# Altium PCB Mini Multi Function Device_F.PcbDoc (part 2 of 2)
Units mm, origin at the board's own origin, x right, y up, seen from the top; angles counter-clockwise.
Board outline 25.03 x 34.92 mm, 2 copper layers (Top Layer, Bottom Layer), stack 0.51 mm thick; 32 components, 32 nets, 155 pads, 45 vias.
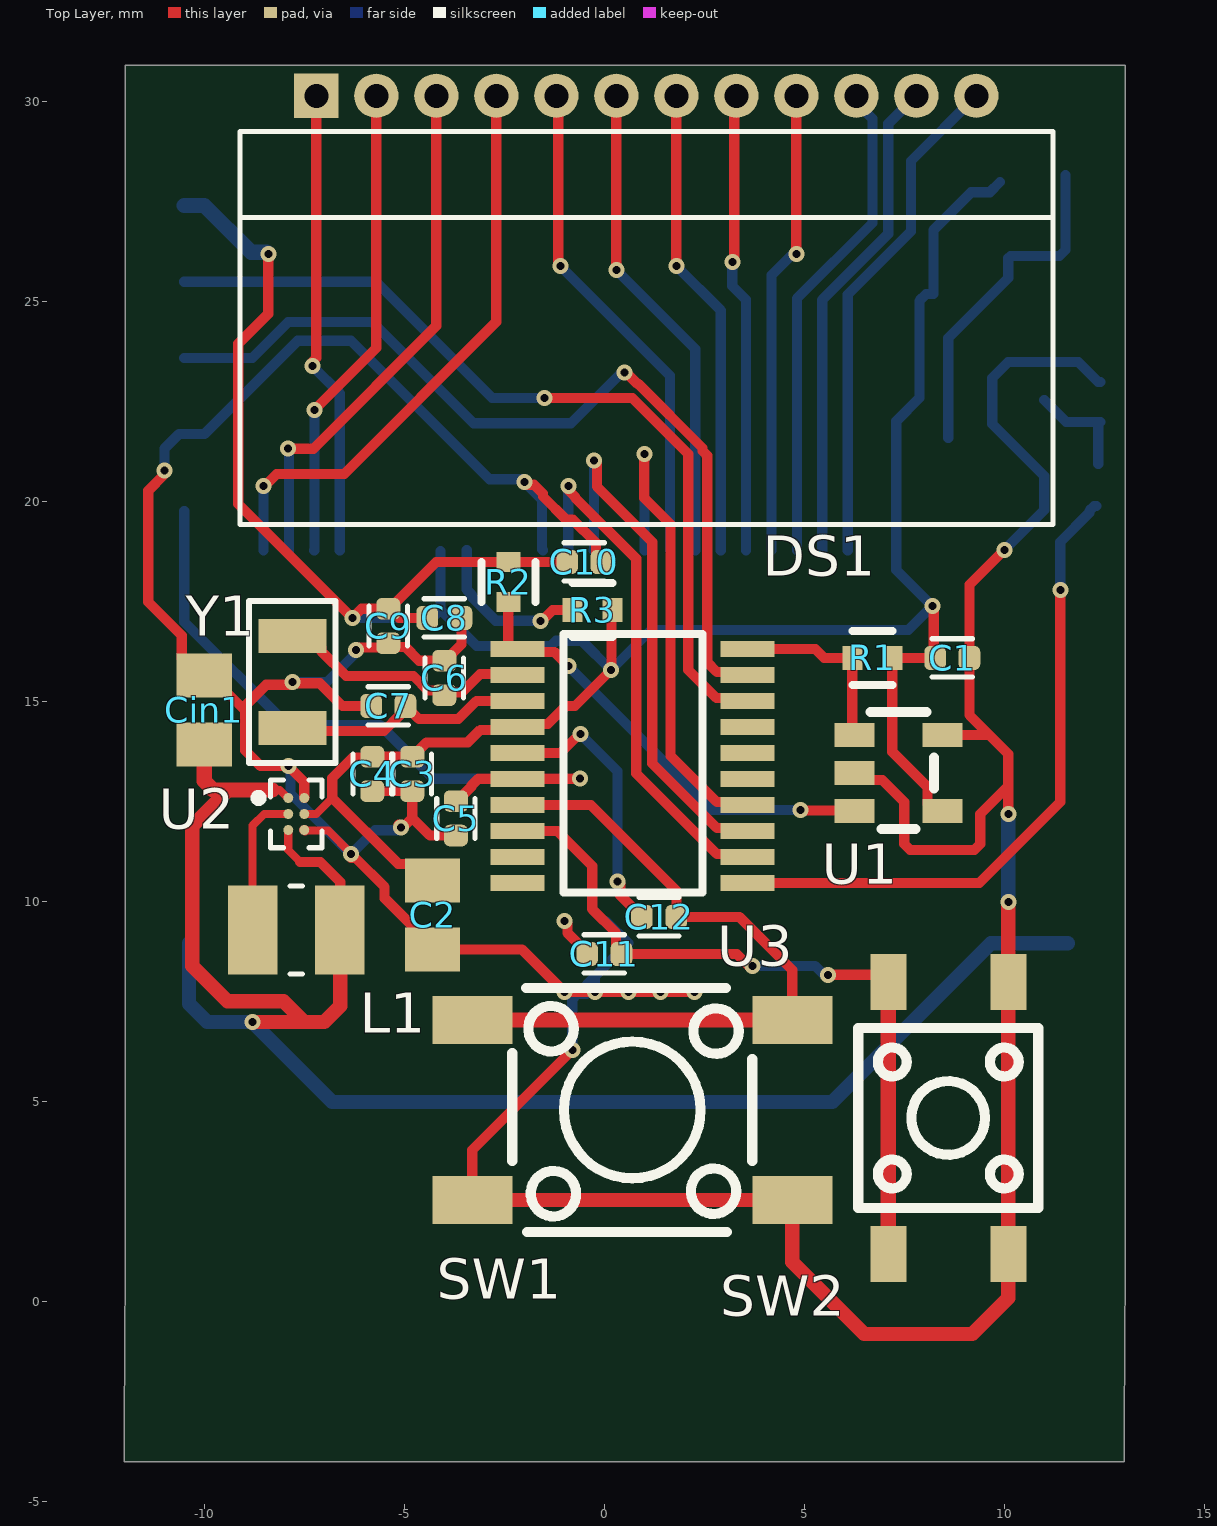
[diagram p0: Top Layer view]

## Part data (continued)
U3: "Microcontroller 32-bit ARM Cortex-M0+ RISC 32KB Flash 3.3V 20-Pin TSSOP Tray", Ambient Temperature Range High=85°C, Case/Package=TSSOP, Clock Frequency=64MHz, LCSC PART=C724040, Manufacturer=STMicroelectronics, Max Junction Temperature (Tj)=105°C, Max Supply Current=8.3mA, Max Supply Voltage=3.6V, Min Operating Temperature=-40°C, Min Supply Voltage=2V, Nominal Supply Voltage (DC)=3V, Supplier Part Number=497-STM32G030F6P6-ND, ADC Channels (Resolution)="16-Ch 12-Bit", Category=Microcontrollers, China RoHS=Compliant, ComponentLink1Description=https://datasheet.octopart.com:443/STM32G030F6P6-STMicroelectronics-datasheet-137692524.pdf?src-supplier=TME, ComponentLink1URL=https://datasheet.octopart.com:443/STM32G030F6P6-STMicroelectronics-datasheet-137692524.pdf?src-supplier=TME, Core Architecture="ARM Cortex-M0+", Country of Origin="Mainland China, Philippines, Taiwan", Data Bus Width=32b, EEPROM Memory Size=0B, Export Control Classification Number (ECCN) Code=3A991.A.2, Flash Memory Size=32kB, Frequency=64MHz, Harmonized Tariff Schedule (HTS) Code=8542.31.00.25, Height=1.2mm, Height - Seated (Max)=1.2mm, Interface=I2S, Introduction Date=2019-08-13, Length=6.5mm, Lifecycle Status=Production, Manufacturer Part Number=STM32G030F6P6, Max Operating Temperature=85°C, Memory Format=FLASH, Memory Size=32kB, Number of A/D Converters=1, Number of ADC Channels=16, Number of Channels=16, Number of I2C Channels=2, Number of I/Os=2, Number of PWM Channels=11, Number of SPI Channels=2, Number of Terminals=20, Number of Timers/Counters=6, Number of UART Channels=2, Number of USART Channels=2, Peripherals="POR, RTC", Pricing="1=2.18, 10=1.604, 74=1.32919, 148=1.26466, 518=1.10917 (USD)", RAM Size=8kB, REACH SVHC=Unaffected, RoHS=Compliant, Schedule B="8542310000, 8542310000|8542310000|8542310000|8542310000|8542310000", Stock=75079, Supplier=DigiKey, Terminal Pitch=650µm, Width=4.4mm
U4: "-25℃~+75℃ 0.1uA 1/3,1/2 1/4,1/3,1/2 2.4V~5.2V 256kHz 3-Wire Serial Interface 32 Segment 32x4 bit 60uA Built-in oscillator SSOP-48 LCD Drivers ROHS", LCSC PART=C18190086
Y1: library part X321532768KGD2SI, "-40℃~+85℃ 12.5pF 32.768kHz 70kΩ SMD crystal oscillator ±20ppm ±30ppm SMD3215-2P Crystals ROHS", LCSC PART=C620155

## Via types
v1: diameter 0.4, hole 0.2, Top Layer to Bottom Layer, 45 vias

## Nets (pads, with @x,y where several pads share a name; then routed paths per layer and width w, separated by ;. In a path a pad name is that pad's centre, name@x,y a point inside that pad or via, vN(x,y) a via of type N, cw(c..) or ccw(c..) an arc to the next point about the centre after c; other vN are vias at no path point)
+3V3: C1.2 C2.2 C3.2 C4.2 C8.2 C9.2 C10.2 D1.3 J1.1 M1.1 R1.1 R2.1 R3.1 U1.4 U2.B2 U3.4 U4.17 | length 71.2
  Top Layer w0.203: U2.B2 -7.2,12.2 -6.8,12.6
  Top Layer w0.254: v1(-8.4,26.2) -8.4,24.703 -9.149,23.954 -9.149,19.949 v1(-6.3,17.1) -6.07,17.33 C9.2 C9.2@-5.37,17.33 ; C4.2@-5.853,13.623 -5.869,13.607 -6.293,13.607 -6.8,13.1 -6.8,12.6 -5.152,10.952 -4.704,10.952 C2.2 ; C4.2 C3.2 -4.779,13.63 -4.637,13.772 -4.637,13.793 -4.441,13.989 -3.411,13.989 -3.098,14.302 -2.248,14.302 -2.102,14.448 -1.415,14.448 -0.963,14.9 -0.732,14.9 v1(0.168,15.8) 0.184,15.816 0.184,17.284 R3.1 ; C8.2 -5.131,17.1 -5.361,17.33 C9.2@-5.37,17.33 ; C10.2 R2.1 -4.2,18.5 C9.2@-5.37,17.33 ; v1(8.2,17.4) 8.235,17.365 8.235,16.135 C1.2 R1.1 7.2,13.755 8.078,12.877 8.078,12.447 8.251,12.274 U1.4
  Bottom Layer w0.254: v1@-6.315,17.1 -4.3,17.1 -4.094,17.306 ; U4.17@-4.094,18.771 -4.094,17.306 ; M1.1@9.895,28 9.636,27.741 9.174,27.741 8.227,26.794 8.227,25.2 8.051,25.2 7.878,25.027 7.878,22.599 7.3,22.021 7.3,18.3 v1(8.2,17.4) 7.6,16.8 1.168,16.8 v1(0.168,15.8) -0.564,16.532 -1.205,16.532 -1.338,16.398 -3.187,16.398 -4.094,17.306
  Bottom Layer w0.381: J1.1 -10,27.41 -8.834,26.244 -8.444,26.244 v1(-8.4,26.2)
COM0: DS1.1 U4.21 | length 11.7
  Top Layer w0.254: v1(-7.3,23.4) -7.3,23.496 -7.199,23.597 DS1.1
  Bottom Layer w0.254: v1(-7.3,23.4) -6.615,22.715 U4.21
COM1: DS1.2 U4.22 | length 12
  Top Layer w0.254: v1(-7.247,22.3) -5.699,23.848 DS1.2
  Bottom Layer w0.254: U4.22 -7.248,18.792 v1(-7.247,22.3) v1(-7.247,22.3)
COM2: DS1.3 U4.23 | length 13.3
  Top Layer w0.254: v1(-7.901,21.332) -7.268,21.332 -4.199,24.401 DS1.3
  Bottom Layer w0.254: v1(-7.901,21.332) -7.885,21.316 U4.23
COM3: DS1.4 U4.24 | length 14.8
  Top Layer w0.254: v1(-8.517,20.4) -8.49,20.4 -8.19,20.7 -6.5,20.7 -2.699,24.501 DS1.4
  Bottom Layer w0.254: U4.24 -8.518,18.792 v1(-8.517,20.4) v1(-8.517,20.4)
CS: U3.14 U4.9 | length 12.7
  Top Layer w0.254: v1(1,21.2) 1,20.1 1.656,19.444 1.656,13.657 2.815,12.498 3.502,12.498 U3.14
  Bottom Layer w0.254: v1(1,21.2) 1,20.9 1.005,20.895 U4.9
DATA: U3.12 U4.12 | length 13.1
  Top Layer w0.254: v1(-0.9,20.4) -0.9,20.304 -0.73,20.134 -0.73,20.108 0.8,18.579 0.8,13.213 2.815,11.198 3.502,11.198 U3.12
  Bottom Layer w0.254: U4.12 v1(-0.9,20.4)
G: R4.1 U3.11 | length 16.5
  Top Layer w0.254: U3.11 9.375,10.475 11.4,12.5 v1(11.4,17.8)
  Bottom Layer w0.254: v1(11.4,17.8) 11.4,19 12.127,19.727 12.127,19.777 12.25,19.9 R4.1@12.3,19.9
GND: BT1.1 C1.1 C2.1 C3.1 C4.1 C5.1 C6.1 C7.1 C8.1 C9.1 C10.1 C11.1 C12.1 Cin1.1 J1.4 Q1.2 R5.1 SW1.3 SW1.4 SW2.3 SW2.4 U1.2 U1.5 U2.A2 U2.C2 U3.5 U4.13 | length 125.8
  Top Layer w0.203: U2.C2@-7.482,11.782 -6.9,11.782 v1@-6.33,11.213
  Top Layer w0.254: v1(-10.998,20.782) -10.998,20.686 -11.4,20.284 -11.4,17.5 -10.563,16.663 -10.563,16.086 -10.14,15.663 Cin1.1 -9.86,15.663 -8.983,14.786 ; U2.C2 U2.C2@-7.482,11.782 ; U2.A2 -7.5,13 v1(-7.895,13.395) -8.588,13.395 -8.983,13.791 -8.983,14.786 ; v1@-6.33,11.1 -6.217,11.1 -5.492,10.374 -5.492,10.089 -4.44,9.037 -4.3,9.037 C2.1@-4.077,8.814 ; v1(-6.33,11.196) v1@-6.33,11.213 ; v1(-6.209,16.296) -6.141,16.364 -5.506,16.364 C9.1 -5.307,16.377 -4.977,16.377 -4.63,16.03 C6.1 ; C7.1 -6.548,14.9 -7.114,15.466 -7.766,15.466 v1(-7.8,15.5) -7.868,15.432 -8.451,15.432 -8.977,14.906 -8.977,14.792 -8.983,14.786 ; C4.1 C3.1 -4.8,12.1 ; v1@-5.148,11.93 v1(-5.08,11.862) -5.038,11.862 -4.8,12.1 ; C2.1 C2.1@-4.077,8.814 ; C6.1@-3.979,16.03 -3.57,16.439 C8.1 ; C5.1 -4.36,11.66 -4.8,12.1 ; SW1.3 -3.3,3.8 v1(-0.8,6.3) ; U3.5 -1.095,13.725 -0.62,14.2 v1(-0.6,14.2) ; v1(-2,20.5) -1.932,20.432 -1.755,20.432 -1.532,20.209 -1.532,20.138 -0.949,19.556 -0.785,19.556 -0.203,18.974 -0.203,18.633 C10.1 ; v1(-0.991,9.525) -0.923,9.457 -0.923,9.231 -0.43,8.739 C11.1 ; v1@-0.23,7.7 -0.184,7.745 v1(0.61,7.745) ; v1(-0.23,7.745) v1(-0.992,7.745) -2.061,8.814 C2.1@-4.077,8.814 ; v1(0.332,10.516) 0.4,10.448 0.4,10.168 0.779,9.79 0.8,9.79 0.942,9.648 C12.1 ; v1@0.624,7.711 0.659,7.745 v1(1.408,7.745) ; v1@1.408,7.738 1.418,7.748 2.257,7.748 v1(2.259,7.751) ; U1.2 6.424,13.051 6.949,13.051 7.5,12.5 7.5,11.449 7.649,11.3 9.251,11.3 9.4,11.449 9.4,12.2 10.1,12.9 ; U1.5 9.626,14.174 ; v1(10,18.8) 9.13,17.93 C1.1 9.13,14.67 9.626,14.174 ; v1(10.1,12.2) 10.1,12.9 ; 9.626,14.174 10.1,13.7 10.1,12.9
  Top Layer w0.356: SW1.3 SW1.4 4.7,1 6.5,-0.8 9.2,-0.8 10.1,0.1 SW2.3 SW2.4 v1(10.1,10)
  Bottom Layer w0.254: v1(-10.998,20.782) -10.998,21.331 -10.635,21.695 J1.4 -10,21.695 -7.663,24.032 -6.332,24.032 -2.868,20.568 -2.068,20.568 v1(-2,20.5) -1.554,20.054 -1.554,18.81 U4.13 ; v1(-7.895,13.395) -7.844,13.344 -7.844,12.71 v1(-6.33,11.196) ; v1(-7.8,15.5) -6.931,15.5 -6.209,16.222 v1(-6.209,16.296) ; v1@-6.267,11.196 -6.267,11.259 -5.732,11.794 -5.148,11.794 v1(-5.08,11.862) ; v1(-0.992,7.745) -0.946,7.7 BT1.1@-0.67,7.7 ; v1(-0.8,6.3) -0.8,7.57 BT1.1@-0.67,7.7 ; v1(-0.6,14.2) 0.332,13.268 v1(0.332,10.516) ; BT1.1@-0.446,7.7 BT1.1@-0.67,7.7 ; v1(-0.23,7.745) BT1.1@-0.23,8.14 ; BT1.1@0.057,9.513 BT1.1 BT1.1@-0.23,8.14 ; v1(10,18.8) 11,19.8 Q1.2 9.7,21.95 9.7,23.1 10.1,23.5 11.85,23.5 12.35,23 R5.1 ; BT1.1@-0.67,7.7 BT1.1@-0.23,8.14
  Bottom Layer w0.356: v1(10.1,10) v1(10.1,12.2)
I2C_SCL: R1.2 U1.1 U3.20 | length 4.7
  Top Layer w0.254: U3.20 5.275,16.325 5.5,16.1 R1.2 6.2,14.225 U1.1
I2C_SDA: R2.2 U1.3 U3.1 | length 11.5
  Top Layer w0.254: R2.2 -2.4,16.398 -2.327,16.325 U3.1 -2.102,16.252 -1.252,16.252 v1(-0.9,15.9) ; v1(4.9,12.3) 4.913,12.287 6.238,12.287 U1.3
  Bottom Layer w0.254: v1(-0.9,15.9) 2.7,12.3 v1(4.9,12.3)
MAIN_BUTTON: C12.2 SW1.1 SW1.2 U3.7 | length 18.2
  Top Layer w0.254: U3.7 -0.338,12.425 1.802,10.285 C12.2 3.373,9.627 4.7,8.3 SW1.2
  Top Layer w0.381: SW1.1 SW1.2
MODE_BUTTON: C11.2 SW2.1 SW2.2 U3.8 | length 18.5
  Top Layer w0.254: U3.8 -1.175,11.775 -0.3,10.9 -0.3,9.821 0.297,9.224 0.297,8.833 C11.2 3.31,8.7 3.608,8.403 v1(3.704,8.403) ; v1(5.588,8.179) 6.921,8.179 SW2.2
  Top Layer w0.381: SW2.1 SW2.2
  Bottom Layer w0.254: v1(3.704,8.403) 5.268,8.403 5.492,8.179 v1(5.588,8.179)
NetC6_2: C6.2 U3.2 Y1.1 | length 6.5
  Top Layer w0.254: Y1.1 -7.375,16.655 -7.077,16.357 -7.077,16.271 -6.454,15.647 -4.768,15.647 -4.404,15.283 -4.113,15.283 C6.2 -3.927,15.243 -3.557,15.243 -3.1,15.7 -2.2,15.7 U3.2
NetC7_2: C7.2 U3.3 Y1.2 | length 6.3
  Top Layer w0.254: Y1.2 -7.728,14.273 -5.508,14.273 -5.103,14.678 -5.103,14.767 C7.2 -4.97,14.879 -4.828,14.737 -4.798,14.737 -4.634,14.573 -3.648,14.573 -3.196,15.025 U3.3
NetD1_1: D1.1 M1.2 Q1.3 | length 8.4
  Bottom Layer w0.254: Q1.3 8.6,24.1 10.1,25.6 D1.1@10.1,26.095 ; D1.1 11.382,26.15 11.531,26.299 M1.2
NetL1_2: L1.2 U2.B1 | length 3.6
  Top Layer w0.203: L1.2 -8.79,11.91 -8.5,12.2 U2.B1
NetQ1_1: Q1.1 R4.2 R5.2 | length 2.6
  Bottom Layer w0.254: Q1.1 11.55,22 R5.2 ; R4.2@12.35,20.95 R5.2@12.35,21.95
NetR3_2: R3.2 U4.16 | length 4.1
  Top Layer w0.254: v1(-1.6,17.03) -1.557,17.03 -1.287,17.3 R3.2
  Bottom Layer w0.254: U4.16 -3.44,17.808 -3.31,17.677 -3.31,17.626 -2.713,17.03 v1(-1.6,17.03)
RST: C5.2 J1.5 U3.6 | length 17.6
  Top Layer w0.254: C5.2 -3.687,12.52 -3.327,12.881 -3.327,12.902 -3.147,13.082 U3.6@-2.182,13.082 ; U3.6 -2.169,13.081 v1(-0.61,13.081)
  Bottom Layer w0.254: J1.5 -10.5,17 -7.927,14.427 -5.613,14.427 -4.267,13.081 v1(-0.61,13.081)
SEG0: DS1.5 U4.8 | length 12.5
  Top Layer w0.254: DS1.5 -1.149,30.106 -1.149,25.949 v1(-1.1,25.9)
  Bottom Layer w0.254: v1(-1.1,25.9) 1.64,23.16 U4.8
SEG1: DS1.6 U4.7 | length 12.2
  Top Layer w0.254: v1@0.3,25.8 DS1.6
  Bottom Layer w0.254: v1(0.3,25.8) 2.275,23.825 U4.7
SEG2: DS1.7 U4.6 | length 11.8
  Top Layer w0.254: v1(1.8,25.9) DS1.7@1.8,30.155
  Bottom Layer w0.254: v1(1.8,25.9) 2.91,24.79 U4.6
SEG3: DS1.8 U4.5 | length 11.5
  Top Layer w0.254: v1(3.2,26) 3.251,26.05 3.251,30.105 DS1.8
  Bottom Layer w0.254: v1(3.2,26) 3.2,25.4 3.545,25.055 U4.5
SEG4: DS1.9 U4.4 | length 11.7
  Top Layer w0.254: v1(4.8,26.2) DS1.9@4.801,30.155
  Bottom Layer w0.254: U4.4 4.18,25.67 4.71,26.2 v1(4.8,26.2)
SEG5: DS1.10 U4.3 | length 12.3
  Bottom Layer w0.254: U4.3 4.815,25.084 6.706,26.975 6.706,29.579 6.301,29.984 DS1.10
SEG6: DS1.11 U4.2 | length 12.3
  Bottom Layer w0.254: U4.2 5.45,25.053 7.1,26.703 7.1,29.454 DS1.11
SEG7: DS1.12 U4.1 | length 12.7
  Bottom Layer w0.254: U4.1 6.085,25.185 7.669,26.769 7.669,28.523 DS1.12
SWCLK: J1.3 U3.19 | length 22.2
  Top Layer w0.254: v1(0.5,23.232) 0.55,23.232 0.827,22.956 0.847,22.956 2.456,21.347 2.456,21.276 2.573,21.159 2.573,15.99 2.815,15.748 3.502,15.748 U3.19
  Bottom Layer w0.254: J1.3 -8.8,23.6 -7.9,24.5 -5.8,24.5 -3.268,21.968 -0.832,21.968 0.432,23.232 v1(0.5,23.232)
SWDIO: J1.2 U3.18 | length 21.6
  Top Layer w0.254: v1(-1.5,22.6) 0.7,22.6 2.1,21.2 2.1,15.8 2.802,15.098 3.502,15.098 U3.18
  Bottom Layer w0.254: J1.2 -5.705,25.505 -2.8,22.6 v1(-1.5,22.6)
VDD_BAT: BT1.2 Cin1.2 L1.1 U2.A1 U2.C1 | length 45.1
  Top Layer w0.203: -8.3,12.8 -8.113,12.8 -7.913,12.6 U2.A1 ; U2.C1 -7.9,11.3 -7.7,11.1 -7.6,11
  Top Layer w0.254: -7.6,11 -7.1,11 -6.6,10.5 L1.1@-6.6,9.31
  Top Layer w0.356: -9.4,12.8 -10.3,11.9 -10.3,8.4 -9.417,7.517 -8.017,7.517 -7.5,7 ; v1(-8.8,7) -7.5,7 ; L1.1 L1.1@-6.6,9.31 ; L1.1@-6.6,9.29 -6.6,7.4 -7,7 -7.5,7
  Top Layer w0.381: Cin1.2 -10,13.023 -9.777,12.8 -9.4,12.8 -8.3,12.8
  Bottom Layer w0.356: BT1.2@-10.385,8.97 -10.385,7.457 -9.928,7 v1(-8.8,7) -6.8,5 5.7,5 9.67,8.97 BT1.2@11.585,8.97
WR: U3.13 U4.11 | length 13.5
  Top Layer w0.254: v1(-0.254,21.031) -0.186,20.963 -0.186,20.386 1.2,19 1.2,13.463 2.815,11.848 3.502,11.848 U3.13
  Bottom Layer w0.254: U4.11 -0.259,18.796 -0.259,21.026 v1(-0.254,21.031)
pads on no net: D1.2 U3.9 U3.10 U3.15 U3.16 U3.17 U4.10 U4.14 U4.15 U4.18 U4.19 U4.20 U4.25 U4.26 U4.27 U4.28 U4.29 U4.30 U4.31 U4.32 U4.33 U4.34 U4.35 U4.36 U4.37 U4.38 U4.39 U4.40 U4.41 U4.42 U4.43 U4.44 U4.45 U4.46 U4.47 U4.48

## Silkscreen, mask and mechanical layers (free items; w line width, h text height)
BOARD:
  lines w0.025: -12,-4 -12,-3.1 -11.975,0.9 -11.975,30.917 13.025,30.917 13.025,0.9 13,-3.1 13,-4 0,-4 -12,-4

## Text inside footprints (layer, text, board x,y; h text height)
BT1: Bottom Overlay "+" at 12.6,9.004 h1 r180; Bottom Overlay "+" at -11.7,9.104 h1 r180